# Altium PCB f103ret6_w25q64_20210714.PcbDoc
Units mil, origin at the board's own origin, x right, y up, seen from the top; angles counter-clockwise.
Board outline 1974.85 x 625.7 mil, 2 copper layers (Top Layer, Bottom Layer); 37 components, 40 nets, 168 pads, 0 vias.
Unrouted connection lines stored in the file: 90.
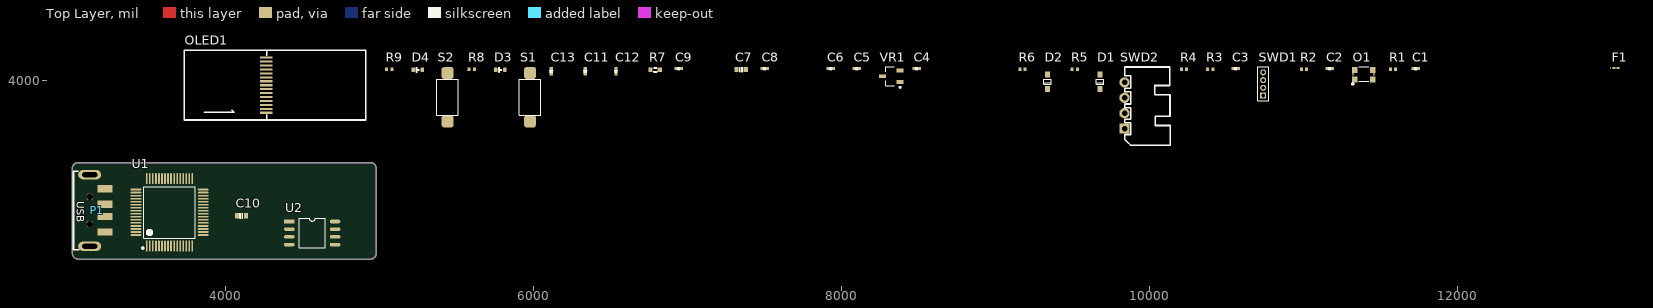
[diagram p0: Top Layer view]
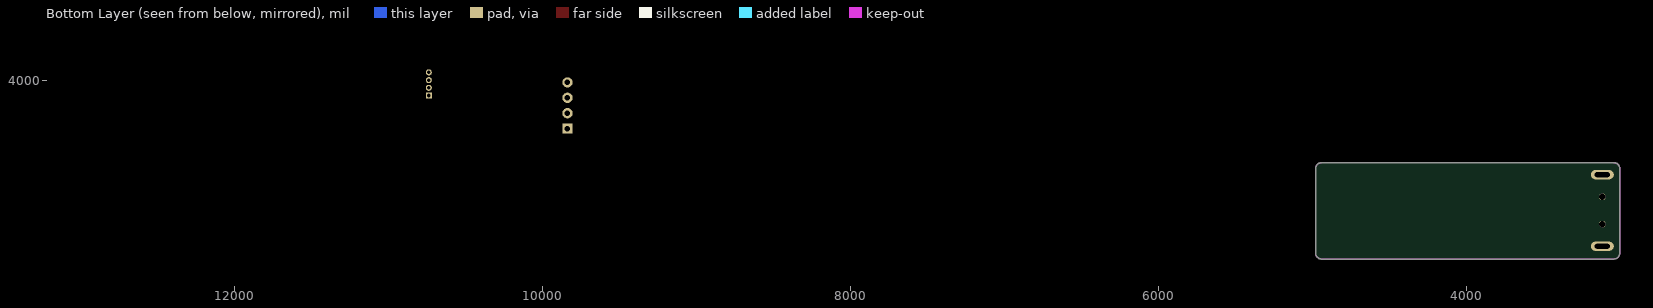
[diagram p1: Bottom Layer view, seen from below]

## Layer stack, top to bottom
Top Solder: solder mask 0.4, Solder Resist, Dk 3.5
Top Layer: signal copper 1.4
Dielectric 1: dielectric 12.6, FR-4, Dk 4.8
Bottom Layer: signal copper 1.4
Bottom Solder: solder mask 0.4, Solder Resist, Dk 3.5

## Board outline
3002.79,2878.32 3002.79,3429.63 3002.8,3430.03 cw(c3040.18,3429.63) 3040.52,3467.02 3040.18,3467.02 4940.39,3467.02 4940.03,3467.02 cw(c4940.39,3429.77) 4977.63,3430.18 4977.64,3429.77 4977.64,2878.35 4977.56,2878.35 cw(c4940.5,2878.41) 4939.83,2841.36 4939.83,2841.32 3040.5,2841.32 cw(c3040.19,2878.72)

## Design rules (kind name [scope] priority, off if disabled: settings)
Clearance Goly [InPolygon] p1: gap=20 ignorepadtopadclearanceinfootprint=FALSE
Clearance [All] p2: gap=3.94 ignorepadtopadclearanceinfootprint=FALSE
ComponentClearance [All] p1: gap=3.94 collisioncheckmode=3 verticalgap=0 showdistances=FALSE
MinimumSolderMaskSliver [All] p1 off: minsoldermaskwidth=10
PolygonConnect [All] p1: connectstyle=Relief reliefconductorwidth=10 reliefentries=4 polygonreliefangle="90 Angle" airgapwidth=10
RoutingVias [All] p1: holewidth=28 width=50 viastyle="Through Hole" minholewidth=28 minwidth=50 maxholewidth=28 maxwidth=50
SilkToSilkClearance [All] p1 off: silktosilkclearance=10
SilkToSolderMaskClearance [IsPad] p1 off: minsilkscreentomaskgap=10 clearancetoexposedcopper=TRUE
SolderMaskExpansion [All] p1: expansion=4
Width [All] p1: maxlimit=30 minlimit=10 preferedwidth=10
26 further rules are at their usual default settings.

## Components (designator, comment, footprint, x,y, rotation, side; value= is the part's Value field where it differs from the comment)
C1 "22pF (220) 5% 50V" C0402 11728.32,4078.73 r0 top
C2 "22pF (220) 5% 50V" C0402 11170.45,4078.73 r0 top
C3 "100nF (104) 10% 50V" C0402 10560.61,4078.73 r0 top
C4 "1uF (105) 10% 50V" C0402 8488.57,4078.73 r0 top
C5 "1uF (105) 10% 50V" C0402 8099.2,4078.73 r0 top
C6 "100nF (104) 10% 50V" C0402 7929.12,4078.73 r0 top
C7 "100nF (104) 10% 50V" C0603 7347.62,4074.8 r0 top
C8 "100nF (104) 10% 50V" C0402 7501.56,4078.73 r0 top
C9 "1uF (105) 10% 50V" C0402 6941.32,4078.73 r0 top
C10 "1uF (105) 10% 50V" C0603 4101.57,3120.47 r180 top
C11 "4.7uF (475) 10% 16V" C0402 6334.24,4061.8 r90 top
C12 "100nF (104) 10% 50V" C0402 6534.24,4061.8 r90 top
C13 "2.2uF (225) 10% 16V" C0402 6113.77,4061.8 r90 top
D1 "1N4148WS T4" SOD-323 9677.93,3992.51 r90 top
D2 "1N4148WS T4" SOD-323 9337.78,3992.51 r90 top
D3 "0603_LED" LED_0603_BLUE 5783.06,4070.46 r0 top
D4 "0603_LED" LED_0603_GREEN 5247.23,4070.46 r0 top
F1 "500mA" 0603 13030.68,4081.49 r0 top
O1 "8MHZ" 3225 11391.71,4041.72 r0 top
OLED1 "QG-2832TLBFG02" 0.91-OLED 4909.17,3693.5 r180 top
P1 "USB" USB_A/P_B 3214.49,3017.21 r270 top
R1 "10KΩ (1002) ±1%" RES0402 11564.15,4074.8 r0 top
R2 "10KΩ (1002) ±1%" RES0402 10986.59,4074.8 r0 top
R3 "1.5KΩ (1501) ±1%" RES0402 10376.75,4074.8 r0 top
R4 "22Ω (22R0) ±1%" RES0402 10206.67,4074.8 r0 top
R5 "22Ω (22R0) ±1%" RES0402 9498.01,4074.8 r0 top
R6 "10KΩ (1002) ±1%" RES0402 9157.86,4074.8 r0 top
R7 "2MΩ (2004) ±1%" RES0603 6789.36,4070.46 r0 top
R8 "1KΩ (1001) ±1%" RES0402 5581.09,4074.8 r0 top
R9 "1KΩ (1001) ±1%" RES0402 5045.27,4074.8 r0 top
S1 "KEY" KEY 5976.37,3892.51 r90 top
S2 "KEY" KEY 5440.54,3892.51 r90 top
SWD1 "MHDR1X4" MHDR1X4 10738.56,3903.54 r90 top
SWD2 "XH2.54*4" XH2.54-WI-4P 9837.78,3838.57 r90 top
U1 "STM32F103RET6" LQFP64 3634.65,3144.88 r0 top
U2 "W25Q64" SOP8_W 4412.99,3085.04 r0 top
VR1 "XC6206P332MR" SOT-23-3L 8322.42,4028.73 r0 top

## Footprints (in the part's own frame and the unit in brackets; to place one, negate y for a bottom-side part, rotate by r counter-clockwise, add the part's x,y. Pads: shape width x height; smd on the part's side, far side on the other; paste and mask are expansions set on the pad)
0.91-OLED [mm]
  rect 2x0.35 smd: 1(16.423,-11.585) 2(16.423,-10.933) 3(16.423,-10.283) 4(16.423,-9.633) 5(16.423,-8.985) 6(16.423,-8.335) 7(16.423,-7.685) 8(16.423,-7.035) 9(16.423,-6.385) 10(16.423,-5.735) 11(16.423,-5.085) 12(16.423,-4.435) 13(16.423,-3.785) 14(16.423,-3.135) 15(16.423,-2.485)
  silkscreen extent -0.02,-12.79 29.98,-1.29
0603 [mm] "Chip Inductor, Body 0.6x0.3mm, IPC High Density"
  rect 0.5x0.3 smd: 1(-0.35,0) 2(0.35,0)
  silkscreen extent -0.9,-0.05 -0.9,0.05, body extent -0.33,-0.18 0.33,0.18, height 0.55
3225 [mm]
  rect 0.9x1 smd: 1(-1.51,-0.905) 2(1.51,-0.905) 3(1.51,0.7) 4(-1.51,0.7)
  silkscreen extent -1.95,-1.75 1.7,1.2, body extent -1.68,-1.41 2.67,1.15, height 0.7
C0402 [mm]
  rect 0.5x0.55 smd: 1(-0.44,0) 2(0.44,0)
  silkscreen extent -0.17,-0.23 0.16,0.23, body extent -0.51,-0.25 0.49,0.25, height 0.5
C0603 [mm]
  rect 0.7x0.85 smd: 1(-0.75,-0.051) 2(0.75,-0.051)
  silkscreen extent -0.24,-0.43 0.24,0.33, body extent -0.8,-0.45 0.8,0.35, height 0.8
KEY [mm]
  rrect50% 2x2 smd: 1(-4,0) 2(4,0)
  silkscreen extent -3,-1.75 3,1.75, body extent -4.5,-1.75 4.5,1.75, height 4.5
LED_0603_BLUE [mil]
  rrect50% 22x30 smd: 1(-30,0) 2(30,0)
  silkscreen extent -10,-16 10,16, body extent -32,-16 32,16, height 24
LED_0603_GREEN [mil]
  rrect50% 22x30 smd: 1(-30,0) 2(30,0)
  silkscreen extent -10,-16 10,16, body extent -32,-16 32,16, height 24
LQFP64 [mm]
  rect 0.28x1.8 smd mask+0.051: 1(-3.75,-5.55)
  oval 0.28x1.8 smd mask+0.051: 2(-3.25,-5.55) 3(-2.75,-5.55) 4(-2.25,-5.55) 5(-1.75,-5.55) 6(-1.25,-5.55) 7(-0.75,-5.55) 8(-0.25,-5.55) 9(0.25,-5.55) 10(0.75,-5.55) 11(1.25,-5.55) 12(1.75,-5.55) 13(2.25,-5.55) 14(2.75,-5.55) 15(3.25,-5.55) 16(3.75,-5.55) 33(3.75,5.55) 34(3.25,5.55) 35(2.75,5.55) 36(2.25,5.55) 37(1.75,5.55) 38(1.25,5.55) 39(0.75,5.55) 40(0.25,5.55) 41(-0.25,5.55) 42(-0.75,5.55) 43(-1.25,5.55) 44(-1.75,5.55) 45(-2.25,5.55) 46(-2.75,5.55) 47(-3.25,5.55) 48(-3.75,5.55)
  oval 1.8x0.28 smd mask+0.051: 17(5.55,-3.75) 18(5.55,-3.25) 19(5.55,-2.75) 20(5.55,-2.25) 21(5.55,-1.75) 22(5.55,-1.25) 23(5.55,-0.75) 24(5.55,-0.25) 25(5.55,0.25) 26(5.55,0.75) 27(5.55,1.25) 28(5.55,1.75) 29(5.55,2.25) 30(5.55,2.75) 31(5.55,3.25) 32(5.55,3.75) 49(-5.55,3.75) 50(-5.55,3.25) 51(-5.55,2.75) 52(-5.55,2.25) 53(-5.55,1.75) 54(-5.55,1.25) 55(-5.55,0.75) 56(-5.55,0.25) 57(-5.55,-0.25) 58(-5.55,-0.75) 59(-5.55,-1.25) 60(-5.55,-1.75) 61(-5.55,-2.25) 62(-5.55,-2.75) 63(-5.55,-3.25) 64(-5.55,-3.75)
  silkscreen extent -4.55,-6.05 4.25,4.25, body extent -6,-6 6,6, height 1.6
MHDR1X4 [mm] "Connector; Header; 4 Position"
  rect 1x1 hole 0.6: 1(0,0)
  round 1 hole 0.6: 2(1.27,0) 3(2.54,0) 4(3.81,0)
  silkscreen extent -0.9,-0.9 4.71,0.9
RES0402 [mm]
  rect 0.5x0.55 smd: 1(0,0) 2(0.88,0)
  body extent -0.09,-0.27 0.96,0.28, height 0.4
RES0603 [mm]
  rect 0.7x0.8 smd: 1(-0.762,0) 2(0.762,0)
  silkscreen extent -0.24,-0.39 0.24,0.39, body extent -0.8,-0.4 0.8,0.4, height 0.45
SOD-323 [mm]
  rect 1x0.83 smd: 1(1.18,0) 2(-1.18,0)
  silkscreen extent -0.4,-0.6 0.4,0.6, body extent -1.35,-0.62 1.35,0.63, height 1.1
SOP8_W [mm]
  rect 1.75x0.6 smd: 1(0,0)
  oval 1.75x0.6 smd: 2(0,-1.27) 3(0,-2.54) 4(0,-3.81) 5(7.536,-3.81) 6(7.536,-2.54) 7(7.536,-1.27) 8(7.536,0)
  silkscreen extent 1.61,-4.36 5.93,0.55, body extent -0.14,-4.54 7.76,0.74, height 2.16
SOT-23-3L [mm] "http://www.aosmd.com/res/packaging_information/SOT-23-3L.pdf"
  rect 1.15x0.65 smd: 1(1.475,-0.95) 2(1.475,0.95) 3(-1.475,0)
  silkscreen extent -0.9,-1.95 1.6,1.55, body extent -0.9,-1.55 0.9,1.55, height 1.25
USB_A/P_B [mm]
  oval 1.524x3.81 hole 0.762 slot 2.5 at 90 deg: 0(-9.443,-2.508) 0(2.357,-2.508)
  round 1.1 hole 1.1: 0(-5.793,-2.508) 0(-1.293,-2.508)
  rect 1.2x2.5 smd: 1(0,0) 2(-2.556,0) 3(-4.556,0) 4(-7.112,0)
  silkscreen extent -9.99,-5.18 2.91,-4.21, body extent -9.91,-20.46 3.04,0.14, height 3.25
XH2.54-WI-4P [mm]
  rect 1.7x1.7 hole 0.9: 1(-3.81,0)
  round 1.7 hole 0.9: 2(-1.27,0) 3(1.27,0) 4(3.81,0)
  silkscreen extent -6.53,-7.53 6.35,0, body extent -6.31,-7.35 6.31,0.35, height 5.73

## Part data
C1 C2: library part "0603 22pF (220) 5%", "贴片电容", Package=0603, SuppliersPartNumber=C1653, ComponentLink1Description=供应商链接, ComponentLink1URL=http://www.szlcsc.com/product/details_2005.html, Supplier=LC
C3 C6 C7 C8 C12: library part "0603 100nF (104) 10%", "贴片电容", Package=0603, SuppliersPartNumber=C14663, ComponentLink1Description=供应商链接, ComponentLink1URL=http://www.szlcsc.com/product/details_15331.html, Supplier=LC
C4 C5 C9 C10: library part "0603 1uF (105) 10%", "贴片电容", Package=0603, SuppliersPartNumber=C15849, ComponentLink1Description=供应商链接, ComponentLink1URL=http://www.szlcsc.com/product/details_16531.html, Supplier=LC
C11: library part "0603 4.7uF (475) 10%", "贴片电容", Package=0603, SuppliersPartNumber=C19666, ComponentLink1Description=供应商链接, ComponentLink1URL=http://www.szlcsc.com/product/details_20375.html, Supplier=LC
C13: library part "0603 2.2uF (225) 10%", "贴片电容", Package=0603, SuppliersPartNumber=C23630, ComponentLink1Description=供应商链接, ComponentLink1URL=http://www.szlcsc.com/product/details_24366.html, Supplier=LC
D1 D2: library part "SOD-323 1N4148WS T4", "二极管", Package=SOD-323, SuppliersPartNumber=C2128, ComponentLink1Description=供应商链接, ComponentLink1URL=http://www.szlcsc.com/product/details_2485.html, Supplier=LC
D3 D4: library part "0603 白灯", "发光二极管", Package=0603, SuppliersPartNumber=C2290, ComponentLink1Description=供应商链接, ComponentLink1URL=http://www.szlcsc.com/product/details_2663.html, Supplier=LC
F1: library part FUSE, "保险丝，熔断丝"
O1: library part OSC, "OSC"
OLED1: library part 0.91-OLED, BOM_Manufacturer=Allvision, BOM_Manufacturer Part=QG-2832TLBFG02, BOM_Supplier=LCSC, BOM_Supplier Part=C91220, Contributor=LCSC, spicePre=O, spiceSymbolName=QG-2832TLBFG02
P1: library part 1470695-2, "USB 1.1, Right Angle, SMT, A Type, Plug, 4 Position, Natural", PackageDocument=21-Jan-2003, ComponentLink1Description="Manufacturer Link", ComponentLink1URL=http://www.tycoelectronics.com/, ComponentLink2Description="Packaging Specification", ComponentLink2URL=http://ecommas.tycoelectronics.com/commerce/DocumentDelivery/DDEController?Action=showdoc&DocId=Customer+Drawing%7F1470695%7FO%7Fpdf%7FEnglish%7FC_1470695_O.pdf, ContactMaterial=Brass, ContactPlating="Gold (30) over Nickel (50)", DatasheetDocument=21-Jan-2003, DrillSize="Corresponds to nominal value.", HousingMaterial=Thermoplastic, PackageReference=1470695A, PanelGround=Without, PCB_Layout="Complies with manufacturer's recommendation.", Published=15-Jul-2004, Publisher="Altium Limited"
R1 R2 R6: library part "0603 10KΩ (10", "贴片电阻", Package=0603, SuppliersPartNumber=C25804, ComponentLink1Description=供应商链接, ComponentLink1URL=http://www.szlcsc.com/product/details_26547.html, Supplier=LC
R3: library part "0603 1.5KΩ (15", "贴片电阻", Package=0603, SuppliersPartNumber=C22843, ComponentLink1Description=供应商链接, ComponentLink1URL=http://www.szlcsc.com/product/details_23570.html, Supplier=LC
R4 R5: library part "0603 22Ω (22", "贴片电阻", Package=0603, SuppliersPartNumber=C23345, ComponentLink1Description=供应商链接, ComponentLink1URL=http://www.szlcsc.com/product/details_24078.html, Supplier=LC
R7: library part "0603 2MΩ (20", "贴片电阻", Package=0603, SuppliersPartNumber=C22976, ComponentLink1Description=供应商链接, ComponentLink1URL=http://www.szlcsc.com/product/details_23703.html, Supplier=LC
R8 R9: library part "0603 1KΩ (10", "贴片电阻", Package=0603, SuppliersPartNumber=C21190, ComponentLink1Description=供应商链接, ComponentLink1URL=http://www.szlcsc.com/product/details_21904.html, Supplier=LC
SWD1: "Header, 4-Pin", LatestRevisionDate=17-Jul-2002, LatestRevisionNote="Re-released for DXP Platform.", Publisher="Altium Limited"
SWD2: library part "Header 4", "Header, 4-Pin", LatestRevisionDate=17-Jul-2002, LatestRevisionNote="Re-released for DXP Platform.", Publisher="Altium Limited"
U1: library part STM32F103RxT6, "STM32F103RxT6"
U2: library part W25Q, "W25Q"
VR1: library part "SOT-23 XC620", "低压差线性稳压(LDO)", Package=SOT-23, SuppliersPartNumber=C5446, ComponentLink1Description=供应商链接, ComponentLink1URL=http://www.szlcsc.com/product/details_5896.html, Supplier=LC

## Nets (pads, with @x,y where several pads share a name; then routed paths per layer and width w, separated by ;. In a path a pad name is that pad's centre, name@x,y a point inside that pad or via, vN(x,y) a via of type N, cw(c..) or ccw(c..) an arc to the next point about the centre after c; other vN are vias at no path point)
3V3: C6.1 C7.2 C8.2 C10.2 OLED1.5 OLED1.7 R2.2 R3.1 R8.2 R9.2 SWD1.4 SWD2.4 U1.1 U1.13 U1.19 U1.32 U1.48 U1.64 U2.3 U2.7 U2.8 VR1.2
5V: C9.2 F1.2 VR1.3
FLASH_CS: U1.37 U2.1
FLASH_MISO: U1.35 U2.2
FLASH_MOSI: U1.36 U2.5
FLASH_SCK: U1.34 U2.6
GND: C1.2 C2.2 C3.1 C6.2 C7.1 C8.1 C9.1 C10.1 C11.1 C12.1 C13.1 O1.2 O1.4 OLED1.6 P1.4 R1.1 R6.1 R7.1 S1.1 S2.1 SWD1.1 SWD2.1 U1.12 U1.18 U1.31 U1.47 U1.63 U2.4 VR1.1
KEY_CHE: S1.2 U1.8
KEY_SEL: S2.2 U1.30
LED_STAT: U1.56
NetC1_1: C1.1 O1.3 U1.5
NetC2_1: C2.1 O1.1 U1.6
NetC3_2: C3.2 R2.1 U1.7
NetC4_1: C4.1 OLED1.2
NetC4_2: C4.2 OLED1.1
NetC5_1: C5.1 OLED1.4
NetC5_2: C5.2 OLED1.3
NetC11_2: C11.2 C12.2 OLED1.15
NetC13_2: C13.2 OLED1.14
NetD1_1: D1.1 U1.43
NetD1_2: D1.2 SWD2.2
NetD2_1: D2.1 U1.42
NetD2_2: D2.2 SWD2.3
NetD3_A: R8.1
NetD4_A: R9.1
NetF1_1: F1.1 P1.1
NetOLED1_13: OLED1.13 R7.2
NetR1_2: R1.2 U1.60
NetR3_2: R3.2 R4.1 U1.45
NetR5_1: R5.1 U1.44
NetR6_2: R6.2 U1.28
NetSWD1_2: SWD1.2 U1.49
NetSWD1_3: SWD1.3 U1.46
OLED_CLK: OLED1.11 U1.21
OLED_CS: OLED1.8 U1.20
OLED_DC: OLED1.10 U1.27
OLED_MOSI: OLED1.12 U1.23
OLED_RES: OLED1.9 U1.26
USB_DM: P1.2 R5.2
USB_DP: P1.3 R4.2
pads on no net: D3.1 D3.2 D4.1 D4.2 P1.0 U1.2 U1.3 U1.4 U1.9 U1.10 U1.11 U1.14 U1.15 U1.16 U1.17 U1.22 U1.24 U1.25 U1.29 U1.33 U1.38 U1.39 U1.40 U1.41 U1.50 U1.51 U1.52 U1.53 U1.54 U1.55 U1.57 U1.58 U1.59 U1.61 U1.62

## Keep-outs
Keep-Out Layer:
  lines w1: 3002.79,2878.32 ccw(c3040.19,2878.72) 3040.5,2841.32 4939.83,2841.32 4939.83,2841.36 ccw(c4940.5,2878.41) 4977.56,2878.35 4977.64,2878.35 4977.64,3429.77 4977.63,3430.18 ccw(c4940.39,3429.77) 4940.03,3467.02 4940.39,3467.02 3040.18,3467.02 3040.52,3467.02 ccw(c3040.18,3429.63) 3002.8,3430.03 3002.79,3429.63 3002.79,2878.32